# Allegro board PLL2.brd
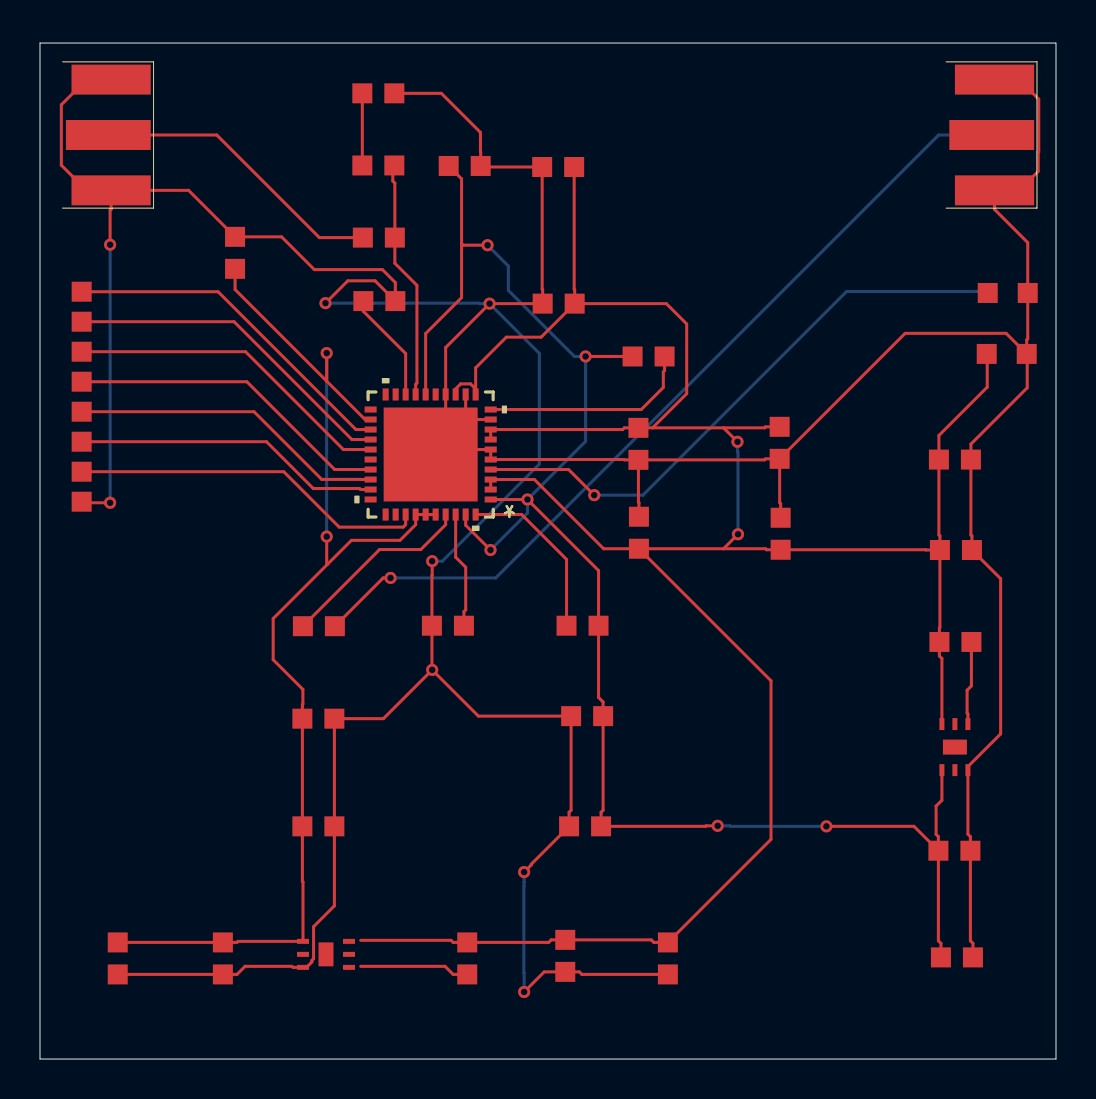
[diagram p0: board, top side]
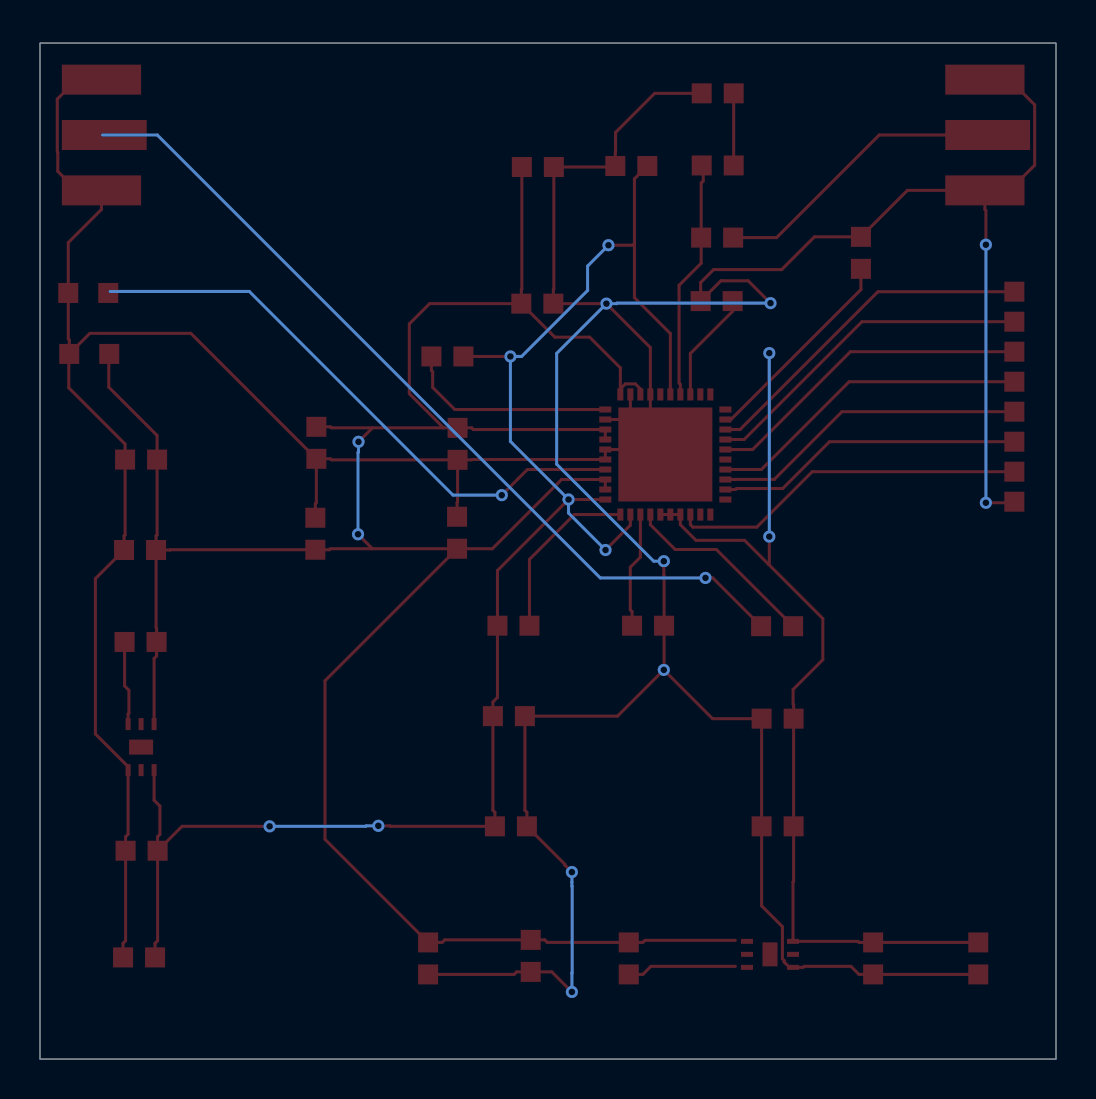
[diagram p1: board, bottom side, seen from below]

Outline 50.8 x 50.8 mm; copper layers: TOP, BOTTOM. Coordinates in mm from the lower left corner of the outline.
Outline path: 0,50.8 50.8,50.8 50.8,0 0,0 0,50.8

## Placement (name value [footprint] x y rotation side)
5V  HEADER 2  [HEADER2]  48.34 35.26 0 top
C1  CAP  [CAPC1608N]  21.23 44.65 180 top
C2  4.5uF  [CAPC1608N]  31.39 5.03 90 top
C3  0.1uF  [CAPC1608N]  26.26 5.16 90 top
C4  0.1uF  [CAPC1608N]  9.14 5.03 90 top
C5  1uF  [CAPC1608N]  3.89 5.03 90 top
C6  0.1uF  [CAPC1608N]  16.92 44.68 0 top
C7  0.1uF  [CAPC1608N]  16.94 41.07 0 top
C8  0.001uF  [CAPC1608N]  16.97 37.9 180 top
C9  CAP  [CAPC1608N]  25.93 37.77 0 top
C10  CAP  [CAPC1608N]  25.91 44.6 0 top
C11  1uF  [CAPC1608N]  9.75 40.31 90 top
C12  1uF  [CAPC1608N]  29.92 30.76 90 top
C13  CAP  [CAPC1608N]  36.98 30.81 90 top
C14  0.1uF  [CAPC1608N]  29.95 26.31 270 top
C15  0.1uF  [CAPC1608N]  37.03 26.26 270 top
C16  0.001uF  [CAPC1608N]  27.13 21.67 180 top
C17  100pF  [CAPC1608N]  13.94 21.64 180 top
C18  1uF  [CAPC1608N]  13.92 17.02 180 top
C19  0.1uF  [CAPC1608N]  13.92 11.63 180 top
C20  100pF  [CAPC1608N]  20.4 21.67 0 top
C21  10pF  [CAPC1608N]  27.36 17.14 0 top
C22  0.1uF  [CAPC1608N]  27.25 11.63 0 top
C23  4.7uF  [CAPC1608N]  45.75 29.97 180 top
C24  0.1uF  [CAPC1608N]  45.8 25.45 180 top
C25  0.1uF  [CAPC1608N]  45.72 10.41 180 top
C26  1uF  [CAPC1608N]  45.85 5.08 180 top
GPIO_SPI  GPIO_SPI  [HEADER8]  2.08 34.37 270 top
J1  SMA_3  [SMA_AMPHENOL_S]  1.3 46.2 0 top
J2  SMA_3  [SMA_AMPHENOL_S]  45.47 46.2 0 top
LP5900_3V3_A  LP5900  [SMP6_1_2]  45.75 15.6 0 top
LP5900_3V3_D  LP5900  [SMP6_1_2]  14.3 5.23 270 top
PLL  hmc701  [HCP_40_1]  19.53 30.23 180 top
PLL_OUT  CON2  [HEADER2]  48.39 38.3 0 top
R1  10K  [CAPC1608N]  21.36 5.03 90 top
R2  51  [CAPC1608N]  16.92 48.29 180 top
R3  0  [CAPC1608N]  30.43 35.13 180 top
R4  10K  [CAPC1608N]  45.77 20.85 180 top

## Library data of the parts
5V = HEADER 2
C1-C26 = CAP
GPIO_SPI = 8 HEADER
J1 J2 = SMA_3
LP5900_3V3_A LP5900_3V3_D = lp5900
PLL = hmc701
PLL_OUT = CON2
R1-R4 = RES

## Footprints (pads in the part's own frame, mm; a bottom-side part is the same pattern mirrored in y, then rotated)
CAPC1608N
  rect 1x1 smd: 1(-0.8,0) 2(0.8,0)
HCP_40_1
  rect 0.605x0.305 smd: 1(-3.002,2.25) 2(-3.002,1.75) 3(-3.002,1.25) 4(-3.002,0.75) 5(-3.002,0.25) 6(-3.002,-0.25) 7(-3.002,-0.75) 8(-3.002,-1.25) 9(-3.002,-1.75) 10(-3.002,-2.25) 21(3.002,-2.25) 22(3.002,-1.75) 23(3.002,-1.25) 24(3.002,-0.75) 25(3.002,-0.25) 26(3.002,0.25) 27(3.002,0.75) 28(3.002,1.25) 29(3.002,1.75) 30(3.002,2.25)
  rect 0.305x0.605 smd: 11(-2.25,-3.002) 12(-1.75,-3.002) 13(-1.25,-3.002) 14(-0.75,-3.002) 15(-0.25,-3.002) 16(0.25,-3.002) 17(0.75,-3.002) 18(1.25,-3.002) 19(1.75,-3.002) 20(2.25,-3.002) 31(2.25,3.002) 32(1.75,3.002) 33(1.25,3.002) 34(0.75,3.002) 35(0.25,3.002) 36(-0.25,3.002) 37(-0.75,3.002) 38(-1.25,3.002) 39(-1.75,3.002) 40(-2.25,3.002)
  rect 4.7x4.7 smd: 41(0,0)
HEADER2
  rect 1x1 smd: 1(-1,0) 2(1,0)
HEADER8
  rect 1x1 smd: 1(-4,0) 2(-2.5,0) 3(-1,0) 4(0.5,0) 5(2,0) 6(3.5,0) 7(5,0) 8(6.5,0)
SMA_AMPHENOL_S
  rect 3.962x1.499 smd: 1(2.261,2.769) 3(2.261,-2.769)
  rect 4.242x1.499 smd: 2(2.121,0)
SMP6_1_2
  rect 0.25x0.6 smd: 1(-0.65,-1.15) 2(0,-1.15) 3(0.65,-1.15) 4(0.65,1.15) 5(0,1.15) 6(-0.65,1.15)
  rect 1.2x0.75 smd: 7(0,0)

## Nets
3VANALOG: C1.2(B) C16.1(A) C21.2(B) C22.2(B) C25.2(B) C26.2(B) LP5900_3V3_A.1(OUT) PLL.1(VCCPRS) PLL.16(RVDD) PLL.39(VCCHF) R3.2(B)
3VDIGITAL: C4.2(B) C5.2(B) C11.1(A) C18.2(B) C19.2(B) LP5900_3V3_D.1(OUT) PLL.22(DVDD1) PLL.34(DVDIO) PLL.35(DVDD2) PLL.36(DVDDQ)
+5V: 5V.1 C2.2(B) C3.2(B) C9.2(B) C10.2(B) C12.2(B) C13.2(B) C14.2(B) C15.2(B) C23.2(B) C24.2(B) LP5900_3V3_A.6(IN) LP5900_3V3_D.6(IN) PLL.2(VCCOA) PLL.3(VPPCP) PLL.7(VPPDRV) PLL.8(VDDPD) PLL.11(VDDPDV) PLL.13(VDDPDR) R1.2(B) R4.2(B)
GND: 5V.2 C1.1(A) C2.1(A) C3.1(A) C4.1(A) C5.1(A) C8.1(A) C9.1(A) C10.1(A) C11.2(B) C12.1(A) C13.1(A) C14.1(A) C15.1(A) C18.1(A) C19.1(A) C20.1(A) C21.1(A) C22.1(A) C23.1(A) C24.1(A) C25.1(A) C26.1(A) GPIO_SPI.8 J1.1 J1.3 J2.1 J2.3 LP5900_3V3_A.3(GND) LP5900_3V3_D.3(GND) PLL.5(GNDCP) PLL.6(GNDDRV) PLL.9(GNDPD) PLL.12(GNDPDV) PLL.14(GNDPDR) PLL.41(GND) PLL_OUT.2 R2.1(A)
GP01: GPIO_SPI.1 PLL.23(GP01)
GP02: GPIO_SPI.2 PLL.24(GP02)
GP03: GPIO_SPI.3 PLL.25(GP03)
LO_IN: C7.1(A) J1.2
PLL_OUT: PLL.4(CP) PLL_OUT.1
SCK: GPIO_SPI.6 PLL.29(SCK)
SDI: GPIO_SPI.5 PLL.28(SDI)
SDO: GPIO_SPI.7 PLL.33(LD_SDO)
SEN: GPIO_SPI.4 PLL.27(SEN)
VCOIP: C17.1(A) J2.2
N54165: C20.2(B) PLL.38(VCOIN)
N54173: C17.2(B) PLL.37(VCOIP)
N54407: PLL.10(N/C1) R3.1(A)
N54561: C8.2(B) PLL.18(REFCAP)
N54573: C6.2(B) C7.2(B) PLL.17(XSIN)
N55151: LP5900_3V3_D.4(EN) R1.1(A)
N76218: LP5900_3V3_A.4(EN) R4.1(A)
N539031: C16.2(B) PLL.40(BIAS)
N542010: C6.1(A) R2.2(B)

Pads without a net: LP5900_3V3_A 2 5 7; LP5900_3V3_D 2 5 7; PLL 15 19 20 21 26 30 31 32

## Via types
v1: diameter 0.61, hole 0.33, TOP to BOTTOM, 20 vias

## Routing (per net, layer and track width the routed paths; a pad name or vN(x,y) marks a point on that pad's centre or on a via; arc(x,y) is an arc through that point)
3VANALOG: length 84.7
  TOP w0.152: PLL.16 19.28,36.28 21.08,38.07 21.08,40.77 ; PLL.1 v1(24.37,27.98) 27.93,24.42 C16.1 27.93,18.08 28.16,17.85 C21.2 28.16,12.44 28.05,12.34 C22.2 33.27,11.63 33.3,11.66 v1(33.88,11.66) ; C25.2 43.7,11.63 v1(39.32,11.63) ; C25.2 44.92,11.12 44.81,11.23 44.81,12.65 45.1,12.94 LP5900_3V3_A.1 ; C25.2 44.92,5.91 45.05,5.78 C26.2 ; 21.08,40.77 21.15,40.69 v1(22.38,40.69) ; 21.08,40.77 21.08,44.01 C1.2 ; R3.2 v1(27.28,35.13) ; v1(22.52,25.45) 21.28,26.69 PLL.39
  BOTTOM w0.152: v1(24.37,27.98) 24.37,27.3 v1(22.52,25.45) ; v1(24.37,27.98) 24.37,27.98 ; v1(24.37,27.98) 27.28,30.88 v1(27.28,35.13) 26.72,35.13 23.42,38.43 23.42,39.65 v1(22.38,40.69) ; v1(39.32,11.63) 34.52,11.63 34.49,11.66 v1(33.88,11.66)
3VDIGITAL: length 59.1
  TOP w0.152: 14.33,33.89 9.75,38.47 C11.1 ; 14.33,33.89 16.25,31.98 PLL.22 ; 14.33,33.89 v1(14.33,35.3) ; 14.36,24.73 14.33,24.76 v1(14.33,26.12) ; 14.36,24.73 11.66,22.02 11.66,19.96 13.14,18.48 13.14,17.75 13.12,17.72 C18.2 C19.2 13.12,8.88 13.15,8.85 LP5900_3V3_D.1 9.9,5.88 9.85,5.83 C4.2 C5.2 ; 14.36,24.73 15.57,25.93 18,25.93 18.78,26.72 PLL.34 PLL.35 PLL.36
  BOTTOM w0.152: v1(14.33,35.3) v1(14.33,26.12)
+5V: length 133.2
  TOP w0.152: C24.2 44.29,25.45 44.28,25.46 C15.2 36.33,25.46 36.28,25.51 34.18,25.51 ; C24.2 45,21.58 44.97,21.56 R4.2 44.97,20.15 45.1,20.03 LP5900_3V3_A.6 ; C24.2 45,26.15 44.95,26.2 C23.2 44.95,31.18 47.36,33.59 47.36,34.87 ; 30.62,31.56 32.33,33.27 32.33,36.75 31.32,37.77 C9.2 ; 30.62,31.56 34.18,31.56 ; 30.62,31.56 C12.2 29.22,31.56 29.13,31.48 PLL.8 PLL.7 ; 34.18,31.56 v1(34.87,30.86) ; 34.18,31.56 36.23,31.56 36.28,31.61 C13.2 ; 21.78,33.51 21.78,34.56 23.32,36.09 25.06,36.09 C9.2 ; 21.78,33.51 21.53,33.76 21.04,33.76 20.78,33.51 PLL.13 ; 21.78,33.51 PLL.11 ; C14.2 36.55,18.91 36.55,10.99 C2.2 30.69,5.83 30.56,5.96 C3.2 25.56,5.96 25.43,5.83 R1.2 20.66,5.83 20.55,5.93 16.03,5.93 ; C14.2 28.18,25.51 24.72,28.98 PLL.3 PLL.2 ; C14.2 34.18,25.51 ; C9.2 26.73,38.47 26.71,38.5 C10.2 ; v1(34.9,26.24) 34.18,25.51
  BOTTOM w0.152: v1(34.87,30.86) 34.87,30.35 34.9,30.33 v1(34.9,26.24)
GND: length 258.5
  TOP w0.152: v1(24.21,3.35) 25.21,4.36 C3.1 26.97,4.36 27.09,4.23 C2.1 ; J2.1 48.96,48.97 49.94,47.99 49.94,45.36 49.91,45.33 49.91,44.39 48.96,43.43 J2.3 47.73,42.48 49.39,40.82 PLL_OUT.2 49.39,36.01 49.34,35.96 5V.2 48.31,36.28 43.26,36.28 C13.1 ; C13.1 36.98,27.82 37.03,27.77 C15.1 ; C13.1 36.28,30.01 36.23,29.96 C12.1 ; J1.3 2.32,43.43 1.07,44.69 1.07,47.71 2.32,48.97 J1.1 ; J1.3 7.43,43.43 C11.2 12.08,41.11 13.72,39.47 17.12,39.47 17.77,38.82 C8.1 16.75,38.91 15.39,38.91 v1(14.27,37.8) ; J1.3 3.56,42.48 3.51,42.43 v1(3.51,40.72) ; C14.1 29.95,27.82 29.92,27.84 C12.1 ; PLL.12 21.28,31.98 ; 21.28,31.98 20.28,30.98 ; 21.28,31.98 PLL.9 ; C12.1 29.22,29.96 29.2,29.98 PLL.5 PLL.6 19.78,30.48 ; v1(19.61,24.89) 19.61,24.18 19.6,24.17 C20.1 19.6,19.44 17.17,17.02 C18.1 C19.1 14.72,7.66 13.68,6.62 13.68,5.01 13.59,4.93 13.59,4.85 13.33,4.58 LP5900_3V3_D.3 12.65,4.58 12.6,4.63 10.25,4.63 9.85,4.23 C4.1 C5.1 ; v1(19.61,19.46) 21.92,17.14 C21.1 26.56,12.44 26.45,12.34 C22.1 24.57,9.74 24.57,9.71 v1(24.21,9.35) ; 19.78,30.48 PLL.41 19.78,29.98 ; 19.78,30.48 20.28,30.98 ; 49.36,34.87 49.36,33.56 46.55,30.75 C23.1 46.55,26.2 46.6,26.15 C24.1 48.03,24.02 48.03,16.26 46.4,14.62 LP5900_3V3_A.3 46.4,11.24 46.52,11.12 C25.1 46.52,5.91 46.65,5.78 C26.1 ; 20.28,30.98 PLL.14 20.28,35.57 v1(22.48,37.77) C9.1 25.13,38.47 25.11,38.5 C10.1 21.73,44.6 21.78,44.65 C1.1 22.03,45.36 22.02,45.37 22.02,46.33 20.07,48.29 R2.1 ; GPIO_SPI.8 2.14,27.81 v1(3.51,27.81)
  BOTTOM w0.152: v1(14.27,37.8) 21.95,37.8 21.97,37.77 v1(22.48,37.77) 24.97,35.28 24.97,29.74 20.12,24.89 v1(19.61,24.89) ; v1(3.51,27.81) v1(3.51,40.72) ; v1(24.21,3.35) 24.21,4.29 24.19,4.31 24.19,8.63 24.2,8.64 24.2,8.84 24.21,8.84 v1(24.21,9.35)
GP01: length 17.5
  TOP w0.152: PLL.23 15.79,31.48 8.9,38.37 GPIO_SPI.1 1.85,38.37
GP02: length 17.1
  TOP w0.152: PLL.24 15.59,30.98 9.7,36.87 GPIO_SPI.2 1.85,36.87
GP03: length 16.5
  TOP w0.152: GPIO_SPI.3 10.28,35.37 15.17,30.48 PLL.25
LO_IN: length 14.9
  TOP w0.152: J1.2 8.84,46.2 13.97,41.07 C7.1
PLL_OUT: length 29.5
  TOP w0.152: v1(27.71,28.19) 26.43,29.48 PLL.4
  BOTTOM w0.152: v1(27.71,28.19) 30.15,28.19 40.34,38.38 47.29,38.38
SCK: length 15.4
  TOP w0.152: GPIO_SPI.6 11.32,30.87 13.67,28.52 15.98,28.52 16.02,28.48 PLL.29
SDI: length 15.9
  TOP w0.152: GPIO_SPI.5 10.7,32.37 14.08,28.98 16.02,28.98 16.02,28.98 PLL.28
SDO: length 17.9
  TOP w0.152: PLL.33 18.28,26.72 18.16,26.59 14.96,26.59 12.19,29.37 GPIO_SPI.7
SEN: length 16.3
  TOP w0.152: PLL.27 14.73,29.48 10.34,33.87 GPIO_SPI.4
VCOIP: length 43.1
  TOP w0.152: C17.1 17.16,24.05 v1(17.53,24.05)
  BOTTOM w0.152: 47.68,46.2 44.93,46.2 22.78,24.05 v1(17.53,24.05)
N54165: length 5.8
  TOP w0.152: PLL.38 20.78,25.09 21.29,24.59 21.29,22.46 21.2,22.37 C20.2
N54173: length 9.7
  TOP w0.152: C17.2 16.98,25.48 19.04,25.48 20.28,26.72 PLL.37
N54407: length 10.7
  TOP w0.152: PLL.10 30.06,32.48 31.17,33.58 31.17,34.36 31.23,34.42 R3.1
N54561: length 5.5
  TOP w0.152: C8.2 16.17,37.39 18.28,35.27 PLL.18
N54573: length 11.9
  TOP w0.152: 17.64,44.6 17.64,43.9 17.74,43.8 C7.2 17.74,39.79 18.85,38.68 18.85,33.8 18.78,33.73 PLL.17
N55151: length 5.5
  TOP w0.152: R1.1 20.66,4.23 20.25,4.63 16.03,4.63
N76218: length 4.2
  TOP w0.152: LP5900_3V3_A.4 46.4,17.25 46.35,17.29 46.35,18.44 46.57,18.66 R4.1
N539031: length 8.8
  TOP w0.152: C16.2 26.33,24.98 24.08,27.22 PLL.40
N542010: length 3.6
  TOP w0.152: C6.1 R2.2
